# Altium PCB Connecter.PcbDoc
Units mil, origin at the board's own origin, x right, y up, seen from the top; angles counter-clockwise.
Board outline 920 x 575 mil, 2 copper layers (Top Layer, Bottom Layer); 5 components, 4 nets, 30 pads, 38 vias.
Unrouted connection lines stored in the file: 4.
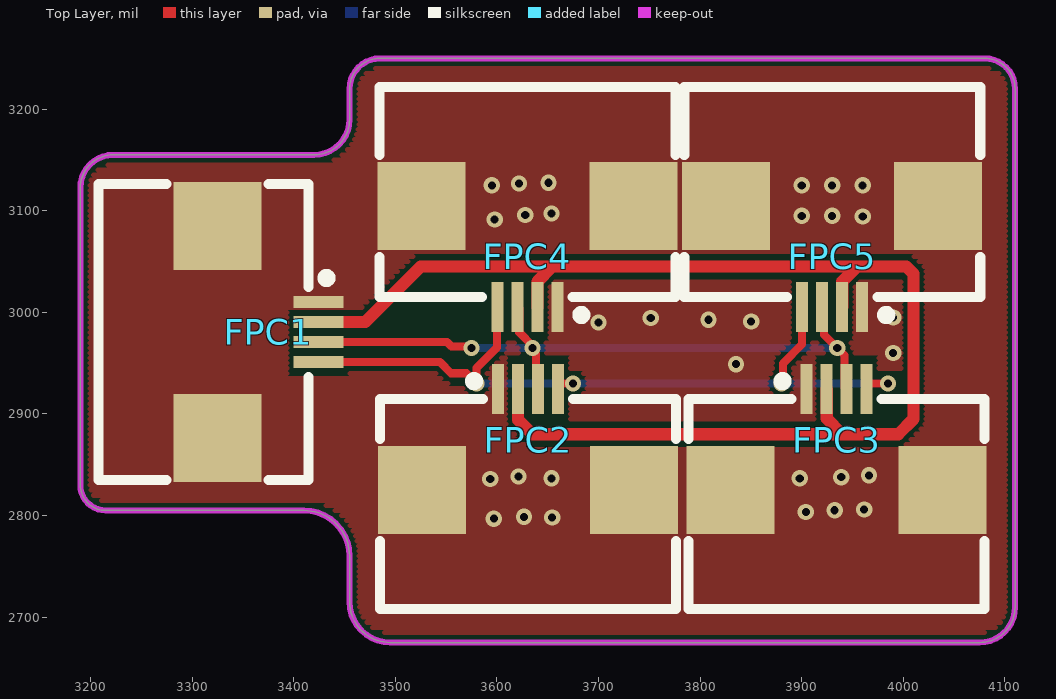
[diagram p0: Top Layer view]
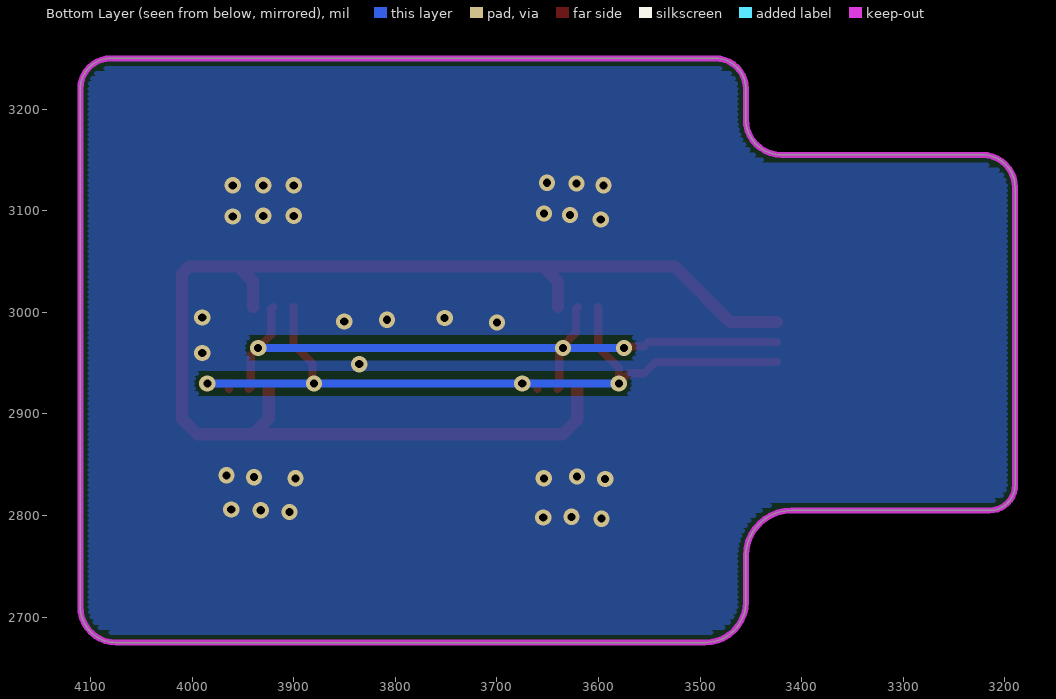
[diagram p1: Bottom Layer view, seen from below]

## Layer stack, top to bottom
Top Solder: solder mask 0.4, Solder Resist, Dk 3.5
Top Layer: signal copper 1.4
Dielectric 1: dielectric 12.6, FR-4, Dk 4.8
Bottom Layer: signal copper 1.4
Bottom Solder: solder mask 0.4, Solder Resist, Dk 3.5

## Board outline
3190,2830 ccw(c3215,2830) 3215,2805 3410,2805 cw(c3410,2760) 3455,2760 3455,2715 ccw(c3495,2715) 3495,2675 4075,2675 ccw(c4075,2710) 4110,2710 4110,3220 ccw(c4080,3220) 4080,3250 3485,3250 ccw(c3485,3220) 3455,3220 3455,3190 cw(c3420,3190) 3420,3155 3222.25,3155 ccw(c3222.25,3122.75) 3190,3122.75

## Design rules (kind name [scope] priority, off if disabled: settings)
Clearance [All] p1: gap=4 ignorepadtopadclearanceinfootprint=FALSE
ComponentClearance [All] p1: gap=0 collisioncheckmode=3 verticalgap=0 showdistances=FALSE
DiffPairsRouting [All] p1: maxlimit=9 minlimit=9 mostfreqgap=9 toplayer_minwidth=4 toplayer_maxwidth=4 toplayer_prefwidth=4 bottomlayer_minwidth=4 bottomlayer_maxwidth=4 bottomlayer_prefwidth=4 maxuncoupledlength=500
FanoutControl Fanout_BGA [All] p1: bgadir=Out bgaviamode=Centered fanoutstyle=Auto fanoutdirection=Alternating viagrid=1 // Fanout_BGA (Default Rule)
HoleSize [All] p1: absolutevalues=TRUE maxlimit=10000 minlimit=8 maxpercent=80.000 minpercent=20.000
MinimumSolderMaskSliver [All] p1 off: minsoldermaskwidth=2
PlaneClearance [All] p1: clearance=8
PlaneConnect [All] p1: planeconnectstyle=Direct reliefexpansion=20 reliefentries=4 reliefconductorwidth=10 reliefairgap=10
PolygonConnect [All] p1: connectstyle=Direct reliefconductorwidth=10 reliefentries=4 polygonreliefangle="90 Angle" airgapwidth=10
RoutingVias [All] p1: holewidth=8 width=16 viastyle="Through Hole" minholewidth=6 minwidth=12 maxholewidth=28 maxwidth=50
SilkToSilkClearance [All] p1: silktosilkclearance=0
SilkToSolderMaskClearance [IsPad] p1: minsilkscreentomaskgap=0 clearancetoexposedcopper=TRUE
SolderMaskExpansion [All] p1: expansion=3 istentingtop=FALSE
Width [All] p1: maxlimit=10000 minlimit=4 preferedwidth=4
21 further rules are at their usual default settings.

## Components (designator, comment, footprint, x,y, rotation, side; value= is the part's Value field where it differs from the comment)
FPC1 "0.5K-DX-4PWB" FPC-SMD_4P-P0.50_DEALON_0.5K-DX-4PWB 3374.7,2980.67 r270 top
FPC2 "0.5K-DX-4PWB" FPC-SMD_4P-P0.50_DEALON_0.5K-DX-4PWB 3630.67,2874.7 r0 top
FPC3 "0.5K-DX-4PWB" FPC-SMD_4P-P0.50_DEALON_0.5K-DX-4PWB 3934.33,2874.7 r0 top
FPC4 "0.5K-DX-4PWB" FPC-SMD_4P-P0.50_DEALON_0.5K-DX-4PWB 3630,3055 r180 top
FPC5 "0.5K-DX-4PWB" FPC-SMD_4P-P0.50_DEALON_0.5K-DX-4PWB 3930,3055 r180 top

## Footprints (in the part's own frame and the unit in brackets; to place one, negate y for a bottom-side part, rotate by r counter-clockwise, add the part's x,y. Pads: shape width x height; smd on the part's side, far side on the other; paste and mask are expansions set on the pad)
FPC-SMD_4P-P0.50_DEALON_0.5K-DX-4PWB [mm]
  rect 0.3x1.25 smd mask+0.05: 1(-0.75,1.263) 2(-0.25,1.263) 3(0.25,1.263) 4(0.75,1.263)
  rect 2.2x2.2 smd mask+0.05: 5(2.65,-1.263) 6(-2.65,-1.263)
  silkscreen extent -3.7,-4.24 3.7,1.56

## Part data
FPC1 FPC2 FPC3 FPC4 FPC5: JLCPCB Part Class="Extended Part", LCSC Part Name="0.5mm P数:4 翻盖式 下接", Manufacturer=HDGC(华德共创), Operating Temperature Range=-20℃~+85℃, Add into BOM=yes, Contact Type=下接, Convert to PCB=yes, Datasheet=https://atta.szlcsc.com/upload/public/pdf/source/20211029/5210AEC837E1AC9B697C39805C1E664F.pdf, Device=0.5K-DX-4PWB, FFC, FCB Thickness=0.3mm, Height Above Board=2mm, Locking Feature=翻盖式, Manufacturer Part=0.5K-DX-4PWB, Mounting Type=卧贴, Name=0.5K-DX-4PWB, Number of Contacts=4, Pitch=0.5mm, Supplier=LCSC, Supplier Footprint=SMD,P=0.5mm, Supplier Part=C2911830, Symbol=0.5K-DX-4PWB

## Via types
v1: diameter 16, hole 8, Top Layer to Bottom Layer, tented both sides, 38 vias

## Nets (pads, with @x,y where several pads share a name; then routed paths per layer and width w, separated by ;. In a path a pad name is that pad's centre, name@x,y a point inside that pad or via, vN(x,y) a via of type N, cw(c..) or ccw(c..) an arc to the next point about the centre after c; other vN are vias at no path point)
GND: FPC1.1 FPC1.5 FPC1.6 FPC2.1 FPC2.5 FPC2.6 FPC3.1 FPC3.5 FPC3.6 FPC4.1 FPC4.5 FPC4.6 FPC5.1 FPC5.5 FPC5.6
  other v1: 3597.02,2796.96 3654.41,2798.14 3626.6,2798.73 3904.06,2803.46 3932.45,2805.24 3961.44,2805.83 3593.48,2836 3653.82,2836.59 3898.14,2836.59 3621.28,2838.37 3938.96,2837.77 3966.17,2839.55 3835.43,2948.99 3990,2960 3700,2990 3850.22,2991 3808.22,2992.77 3751.43,2994.55 3990,2995 3597.76,3091.49 3960.03,3094.44 3900,3095 3930,3095 3627.95,3095.91 3653.72,3097.38 3595,3125 3900,3125 3930,3125 3960,3125 3621.69,3126.83 3650.78,3127.57
I2C_SCL: FPC1.3 FPC2.3 FPC3.3 FPC4.3 FPC5.3 | length 693.2
  Top Layer w8: FPC1.3 3551,2970.82 3555.29,2966.53 3573.47,2966.53 v1(3575,2965) ; FPC4.3 3622.06,3003.39 3622.06,2980.11 3635,2967.16 3635,2962.84 3638.61,2959.22 3638.61,2926.32 FPC2.3 ; FPC5.3 3922.06,3003.39 3922.06,2977.94 v1(3935,2965) 3942.27,2957.73 3942.27,2926.32 FPC3.3
  Bottom Layer w8: v1(3575,2965) v1(3635,2965) v1(3935,2965)
I2C_SDA: FPC1.4 FPC2.4 FPC3.4 FPC4.4 FPC5.4 | length 781.8
  Top Layer w8: FPC1.4 3543.86,2951.14 3555,2940 3570,2940 v1(3580,2930) 3580,2945.09 3600.24,2965.32 3600.24,3005.06 FPC4.4 ; FPC2.4 3660.2,2928.09 3662.11,2930 v1(3675,2930) ; v1(3880,2930) 3881.53,2931.53 3881.53,2949.78 3900.35,2968.6 3900.35,3005.18 FPC5.4 ; FPC3.4 3963.86,2928.09 3965.77,2930 v1(3985,2930)
  Bottom Layer w8: v1(3580,2930) v1(3675,2930) v1(3985,2930)
VBUS_IN: FPC1.2 FPC2.2 FPC3.2 FPC4.2 FPC5.2 | length 1328
  Top Layer w12: FPC1.2 3470.51,2990.51 3525,3045 3654.57,3045 ; FPC2.2 3620.83,2894.17 3635,2880 3940,2880 ; FPC4.2 3639.94,3005.39 3639.94,3030.36 3654.57,3045 ; FPC3.2 3924.58,2924.32 3924.58,2895.42 3940,2880 ; FPC5.2 3939.94,3005.39 3939.94,3030.36 3954.57,3045 ; 3654.57,3045 3954.57,3045 ; 3940,2880 3995,2880 4010,2895 4010,3037.97 4002.97,3045 3954.57,3045

## Polygon pours and split planes (outlines as drawn)
GND on Top Layer "GND_L01_P000" (hatched Horizontal grid 5 track 5, remove dead copper, pour order 0): 3195,3270 3200,3275 4215,3275 4215,2645 4180,2610 4145,2645 3120,2645
GND on Bottom Layer "GND_L02_P002" (hatched Horizontal grid 5 track 5, remove dead copper, pour order 2): 3105,3350 3130,3325 4435,3325 4435,2730 4240,2535 3075,2535

## Keep-outs
Keep-Out Layer:
  lines w6: 3190,2830 ccw(c3215,2830) 3215,2805 3410,2805 cw(c3410,2760) 3455,2760 3455,2715 ccw(c3495,2715) 3495,2675 4075,2675 ccw(c4075,2710) 4110,2710 4110,3220 ccw(c4080,3220) 4080,3250 3485,3250 ccw(c3485,3220) 3455,3220 3455,3210 3455,3190 cw(c3420,3190) 3420,3155 3222.25,3155 ccw(c3222.25,3122.75) 3190,3122.75 3190,2849.49 3190,2830

## Silkscreen, mask and mechanical layers (free items; w line width, h text height)
Mechanical 1:
  the board outline again, w6